# Altium PCB PCB.PcbDoc
Units mm, origin at the board's own origin, x right, y up, seen from the top; angles counter-clockwise.
Board outline 74.29 x 27.84 mm, 2 copper layers (Top Layer, Bottom Layer); 10 components, 6 nets, 29 pads, 2 vias.
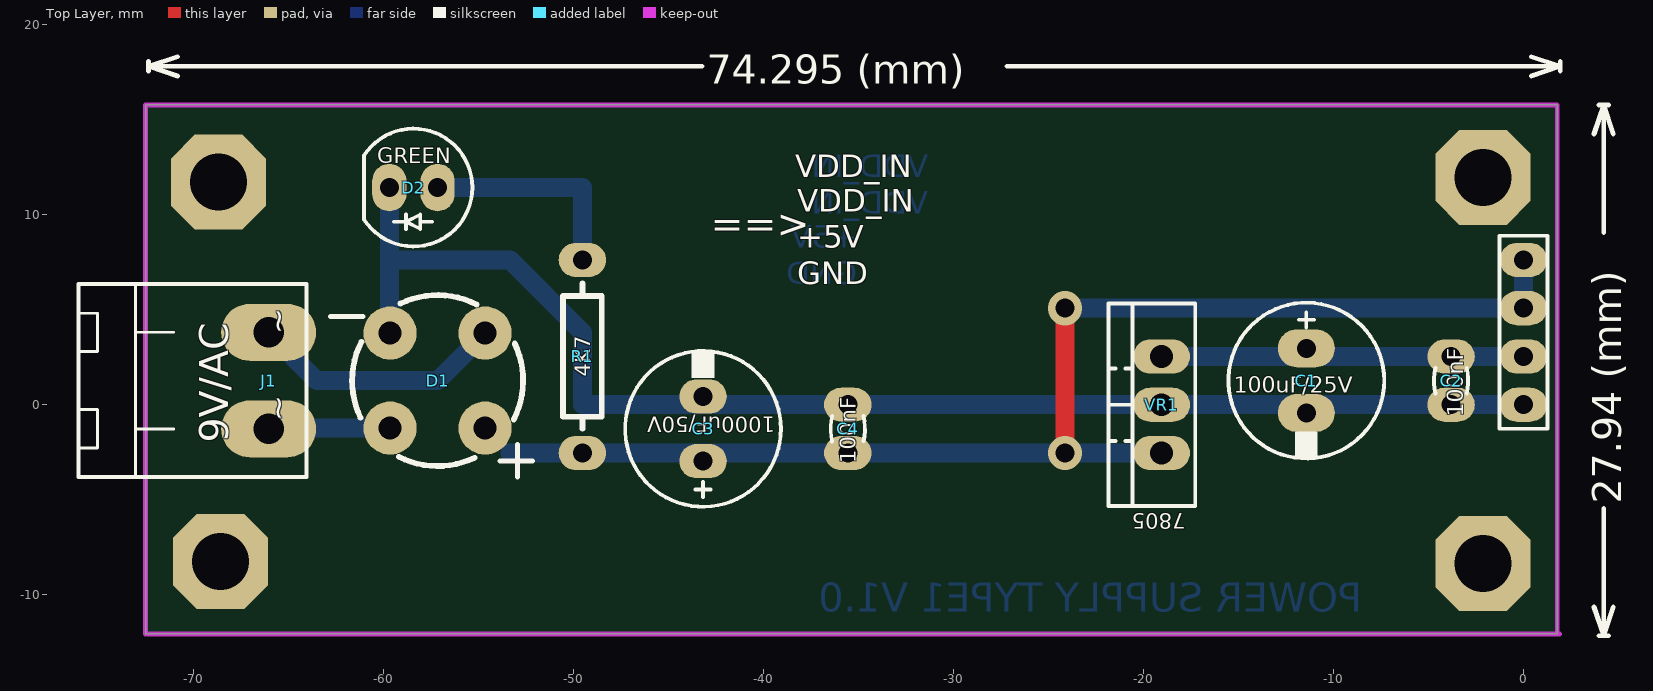
[diagram p0: Top Layer view]
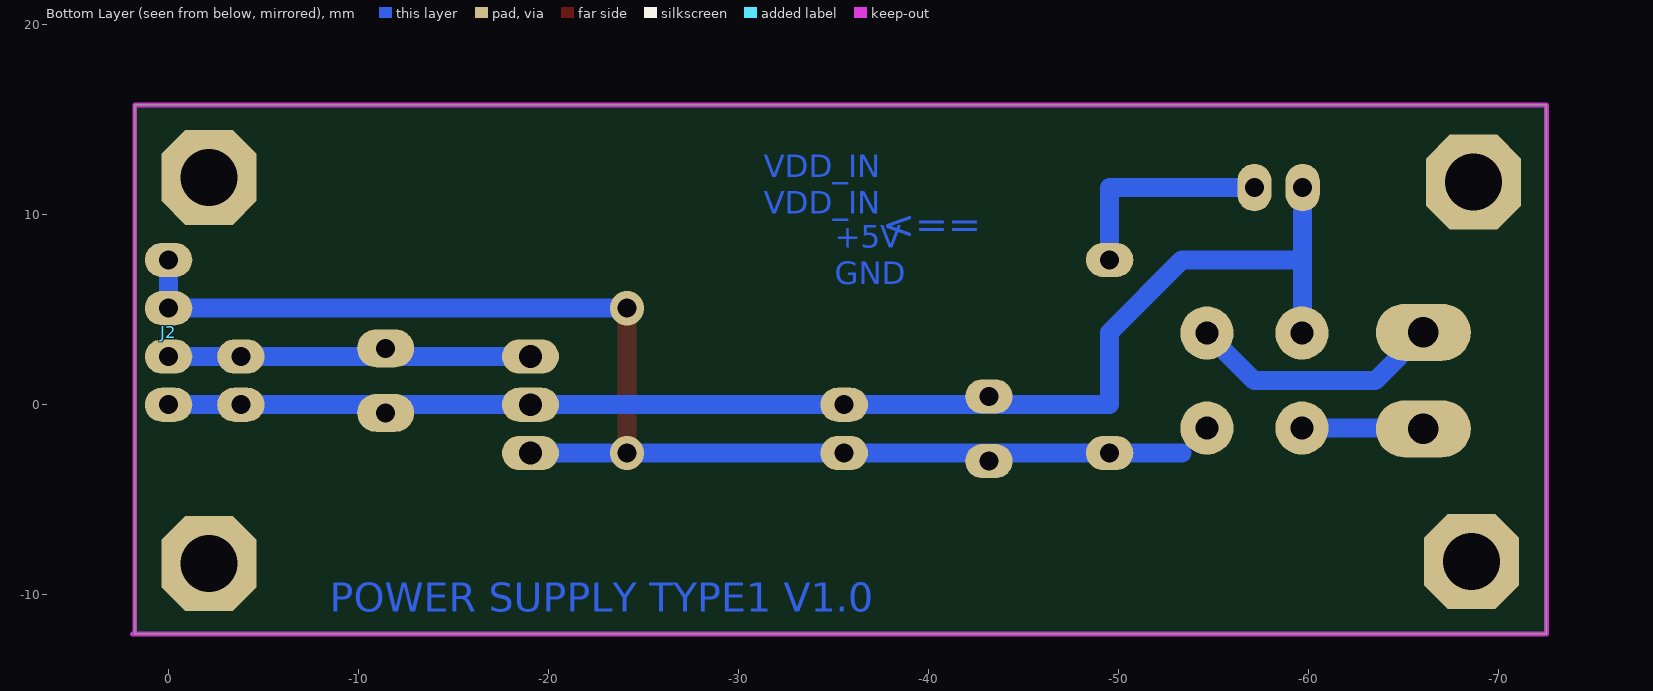
[diagram p1: Bottom Layer view, seen from below]
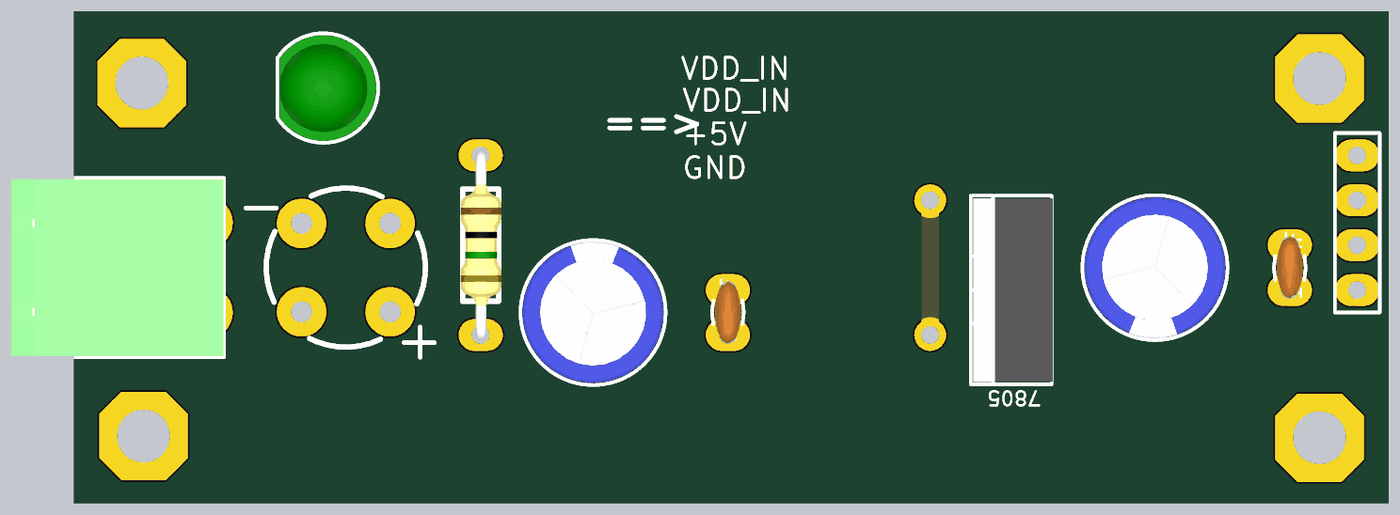
[diagram p2: 3D render of the assembled board from above, using the file's embedded part models]

## Layer stack, top to bottom
Top Solder: solder mask 0.0102, Solder Resist, Dk 3.5
Top Layer: signal copper 0.0356
Dielectric 1: dielectric 0.32, FR-4, Dk 4.8
Bottom Layer: signal copper 0.0356
Bottom Solder: solder mask 0.0102, Solder Resist, Dk 3.5

## Board outline
-72.517,-12.065 1.778,-12.065 1.778,15.777 -72.517,15.777

## Design rules (kind name [scope] priority, off if disabled: settings)
Clearance [All] p1: gap=0.254
PolygonConnect [All] p1: connectstyle=Relief reliefconductorwidth=0.254 reliefentries=4 polygonreliefangle="90 Angle" airgapwidth=0.254
RoomDefinition Main [InComponentClass('Main')] p1: confinementstyle=ConfineIn formatcopy=TRUE lockcomponents=FALSE outline -4.291,-1.624 -4.291,9.244 -1.043,9.244 -1.043,-1.624
RoutingVias [All] p1: holewidth=0.711 width=1.27 viastyle="Through Hole" minholewidth=0.711 minwidth=1.27 maxholewidth=0.711 maxwidth=1.27
SolderMaskExpansion [All] p1: expansion=0.102
Width [All] p1: maxlimit=1 minlimit=0.3 preferedwidth=0.5
30 further rules are at their usual default settings.

## Components (designator, comment, footprint, x,y, rotation, side; value= is the part's Value field where it differs from the comment)
C1 "100uF/25V" C_THD_EL_(P3.4-D8-H7)#1 -11.43,1.27 r270 top
C2 "100nF" C_THD_CER_(P2.54-D3.5-T1.5) -3.81,1.27 r270 top
C3 "1000uF/50V" C_THD_EL_(P3.4-D8-H7)#2 -43.18,-1.27 r90 top
C4 "100nF" C_THD_CER_(P2.54-D3.5-T1.5) -35.56,-1.27 r90 top
D1 "Bridge1" BRIDGE-1 -57.15,1.27 r180 top
D2 "GREEN" LED_THD_5MM_GREEN -58.42,11.43 r180 top
J1 "2PIN" Connector_Phoenix_2PIN_MSTB -66.04,1.27 r90 top
J2 "4Pin" HDR1X4 0,0 r270 bottom
R1 "4K7" R_THD_AXIAL0.4(1/4W) -49.53,2.54 r270 top
VR1 "7805" TO220_3PIN_V -19.05,0 r90 top

## Footprints (in the part's own frame and the unit in brackets; to place one, negate y for a bottom-side part, rotate by r counter-clockwise, add the part's x,y. Pads: shape width x height; smd on the part's side, far side on the other; paste and mask are expansions set on the pad)
BRIDGE-1 [mm] "created by: M.Hariri (designer)"
  round 2.8 hole 1.2: 1(2.5,-2.5) 2(-2.5,-2.5) 3(-2.5,2.5) 4(2.5,2.5)
  silkscreen extent -5,-4.5 5.64,5.07
C_THD_CER_(P2.54-D3.5-T1.5) [mm] "Capacitor, Thru-Hole, Ceramic multilayer, Pitch:2.54mm, Diameter:3.5mm, Thick:1.5mm"
  oval 1.8x2.5 hole 1: 1(-1.27,0) 2(1.27,0)
  silkscreen extent -0.66,-0.9 0.69,0.9, body extent -1.75,-0.75 1.75,0.75, height 4
C_THD_EL_(P3.4-D8-H7)#1 [mm]
  oval 2x3 hole 1: 1(-1.7,0) 2(1.7,0)
  silkscreen extent -4.1,-4.1 4.1,4.1, body extent -4,-4 4,4, height 7.8
C_THD_EL_(P3.4-D8-H7)#2 [mm]
  oval 1.8x2.5 hole 1: 1(-1.7,0) 2(1.7,0)
  silkscreen extent -4.1,-4.1 4.1,4.1, body extent -4,-4 4,4, height 7.8
Connector_Phoenix_2PIN_MSTB [mm] "Phoenix Contact, MSTB 5.08mm Pitch, 2 Way, Right Angle PCB Header"
  oval 3x5 hole 1.6: 1(-2.54,0) 2(2.54,0)
  silkscreen extent -5.08,-2 5.08,10, body extent -5,-1.99 5,10.01, height 8.6
HDR1X4 [mm]
  oval 1.8x2.5 hole 1: 1(0,0) 2(-2.54,0) 3(-5.08,0) 4(-7.62,0)
LED_THD_5MM_GREEN [mm] "LED, THD, 5MM, GREEN"
  oval 1.8x2.5 hole 1: 1(-1.27,0) 2(1.27,0)
  silkscreen extent -3.1,-3.1 2.6,3.1, body extent -2.99,-3 2.5,3, height 9.14
R_THD_AXIAL0.4(1/4W) [mm] "Resistor, Thru-Hole, AXIAL0.4(1/4Watt),"
  oval 1.8x2.5 hole 1: 1(-5.08,0) 2(5.08,0)
  silkscreen extent -3.84,-1.02 3.81,1.02, body extent -5.38,-1.13 5.38,1.18, height 3.51
TO220_3PIN_V [mm] "TO-220 3 LEAD, TO-262, pitch: 2.54mm  10x4.5mm"
  oval 1.8x3 hole 1.2: 1(-2.54,0) 2(0,0) 3(2.54,0)
  silkscreen extent -5.33,-1.78 5.33,2.79, body extent -5.2,-1.85 5.2,2.65, height 19

## Part data
C1 C3: library part Capacitor_Electrolytic, "Capacitor, Electrolytic"
C2 C4: library part Capacitor_Ceramic, "Capacitor, Ceramic Multilayer"
D1: "Full Wave Diode Bridge"
D2: library part LED_GREEN, "LED, Green"
J1: library part Connector_Header_2Pin, "Connector, Header, 2Pin"
J2: library part "Header 4", "Header, 4-Pin"
R1: library part Resistor, "Resistor"
VR1: library part "Volt Reg", "Voltage Regulator, Linear, Fixed, 5v, 1.5A"

## Free pads (board coordinates)
  oct 5x5 hole 3: 0(-68.677,11.713) 0(-68.58,-8.255) 0(-2.129,-8.353) 0(-2.129,11.967)

## Via types
v1: diameter 1.8, hole 1, Top Layer to Bottom Layer, 2 vias

## Nets (pads, with @x,y where several pads share a name; then routed paths per layer and width w, separated by ;. In a path a pad name is that pad's centre, name@x,y a point inside that pad or via, vN(x,y) a via of type N, cw(c..) or ccw(c..) an arc to the next point about the centre after c; other vN are vias at no path point)
5V: C1.1 C2.1 J2.2 VR1.3 | length 19.1
  Bottom Layer w1: VR1.3 C2.1 J2.2
GND: C1.2 C2.2 C3.2 C4.2 D1.1 D2.2 J2.1 VR1.2 | length 72.8
  Bottom Layer w1: D2.2 -59.69,7.62 ; D1.1 -59.69,3.81 -59.69,7.62 ; J2.1 C2.2 VR1.2 C4.2 -49.53,0 -49.53,3.81 -53.34,7.62 -59.69,7.62
NetD1_2: D1.2 J1.2 | length 13.5
  Bottom Layer w1: J1.2 -63.5,1.27 -57.15,1.27 D1.2
NetD1_4: D1.4 J1.1 | length 6.3
  Bottom Layer w1: J1.1@-66,-1.23 D1.4
NetD2_1: D2.1 R1.1 | length 11.4
  Bottom Layer w1: D2.1 -49.53,11.43 R1.1
VDD_IN: C3.1 C4.1 D1.3 J2.3 J2.4 R1.2 VR1.1 | length 68.6
  Top Layer w1: v1(-24.13,-2.54) v1(-24.13,5.08)
  Bottom Layer w1: -53.34,-2.54 R1.2 C4.1 v1(-24.13,-2.54) VR1.1 ; v1(-24.13,5.08) J2.3 J2.4

## Keep-outs
Keep-Out Layer:
  lines w0.254: -72.517,-12.065 -72.517,15.777 1.778,15.777 1.778,-12.065 ; -72.39,-12.065 1.905,-12.065

## Other copper
Bottom Layer:
  text "VDD_IN" at -31.339,11.967 h1.2
  text "==>" at -42.769,10.062 h1.52 r180
  text "VDD_IN" at -31.339,10.062 h1.2
  text "+5V" at -35.052,8.255 h1.2
  text "GND" at -35.052,6.35 h1.2
  text "POWER SUPPLY TYPE1 V1.0" at -8.479,-10.893 h1.52

## Silkscreen, mask and mechanical layers (free items; w line width, h text height)
Top Overlay:
  lines w0.254: -72.36,17.555 -72.36,18.063 ; -70.836,17.301 -72.36,17.809 ; -70.836,18.317 -72.36,17.809 ; -43.237,17.809 -72.36,17.809 ; -27.189,17.809 1.935,17.809 ; 0.411,17.301 1.935,17.809 ; 0.411,18.317 1.935,17.809 ; 1.935,17.555 1.935,18.063 ; 3.713,-10.639 4.221,-12.163 ; 3.713,14.253 4.221,15.777 ; 3.967,-12.163 4.475,-12.163 ; 3.967,15.777 4.475,15.777 ; 4.221,-5.455 4.221,-12.163 ; 4.221,9.07 4.221,15.777 ; 4.729,-10.639 4.221,-12.163 ; 4.729,14.253 4.221,15.777
  text "74.295 (mm)" at -42.983,16.895 h1.52
  text "VDD_IN" at -38.324,11.967 h1.2
  text "VDD_IN" at -38.227,10.16 h1.2
  text "==>" at -42.769,8.792 h1.52
  text "+5V" at -38.227,8.255 h1.2
  text "GND" at -38.227,6.35 h1.2
  text "~" at -64.994,3.712 h1.2 r90
  text "~" at -64.994,-0.86 h1.2 r90
  text "9V/AC" at -68.169,-2.003 h1.52 r90
  text "27.94 (mm)" at 5.135,-5.201 h1.52 r90